# Altium PCB LED_dr_320_v0.1.PcbDoc
Units mm, origin at the board's own origin, x right, y up, seen from the top; angles counter-clockwise.
Board outline 152.4 x 101.6 mm, 2 copper layers (Top Layer, Bottom Layer); 33 components, 22 nets, 101 pads, 8 vias.
Unrouted connection lines stored in the file: 67.
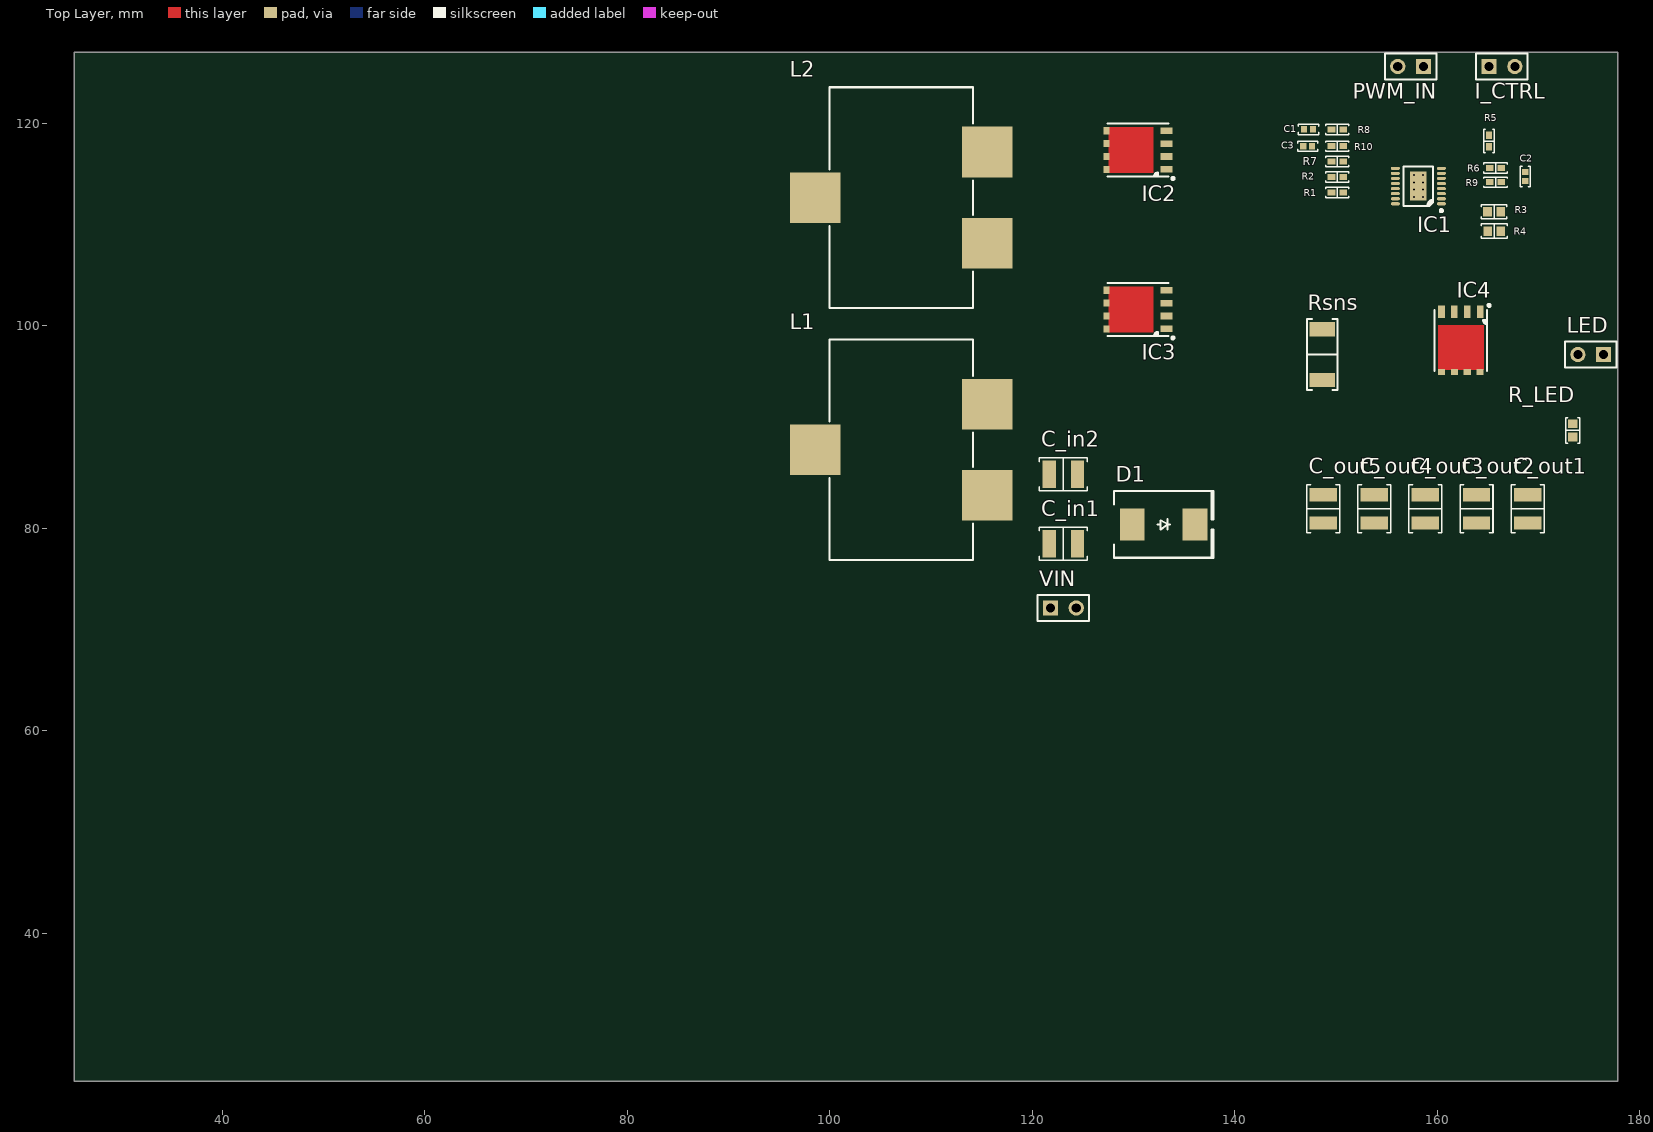
[diagram p0: Top Layer view]
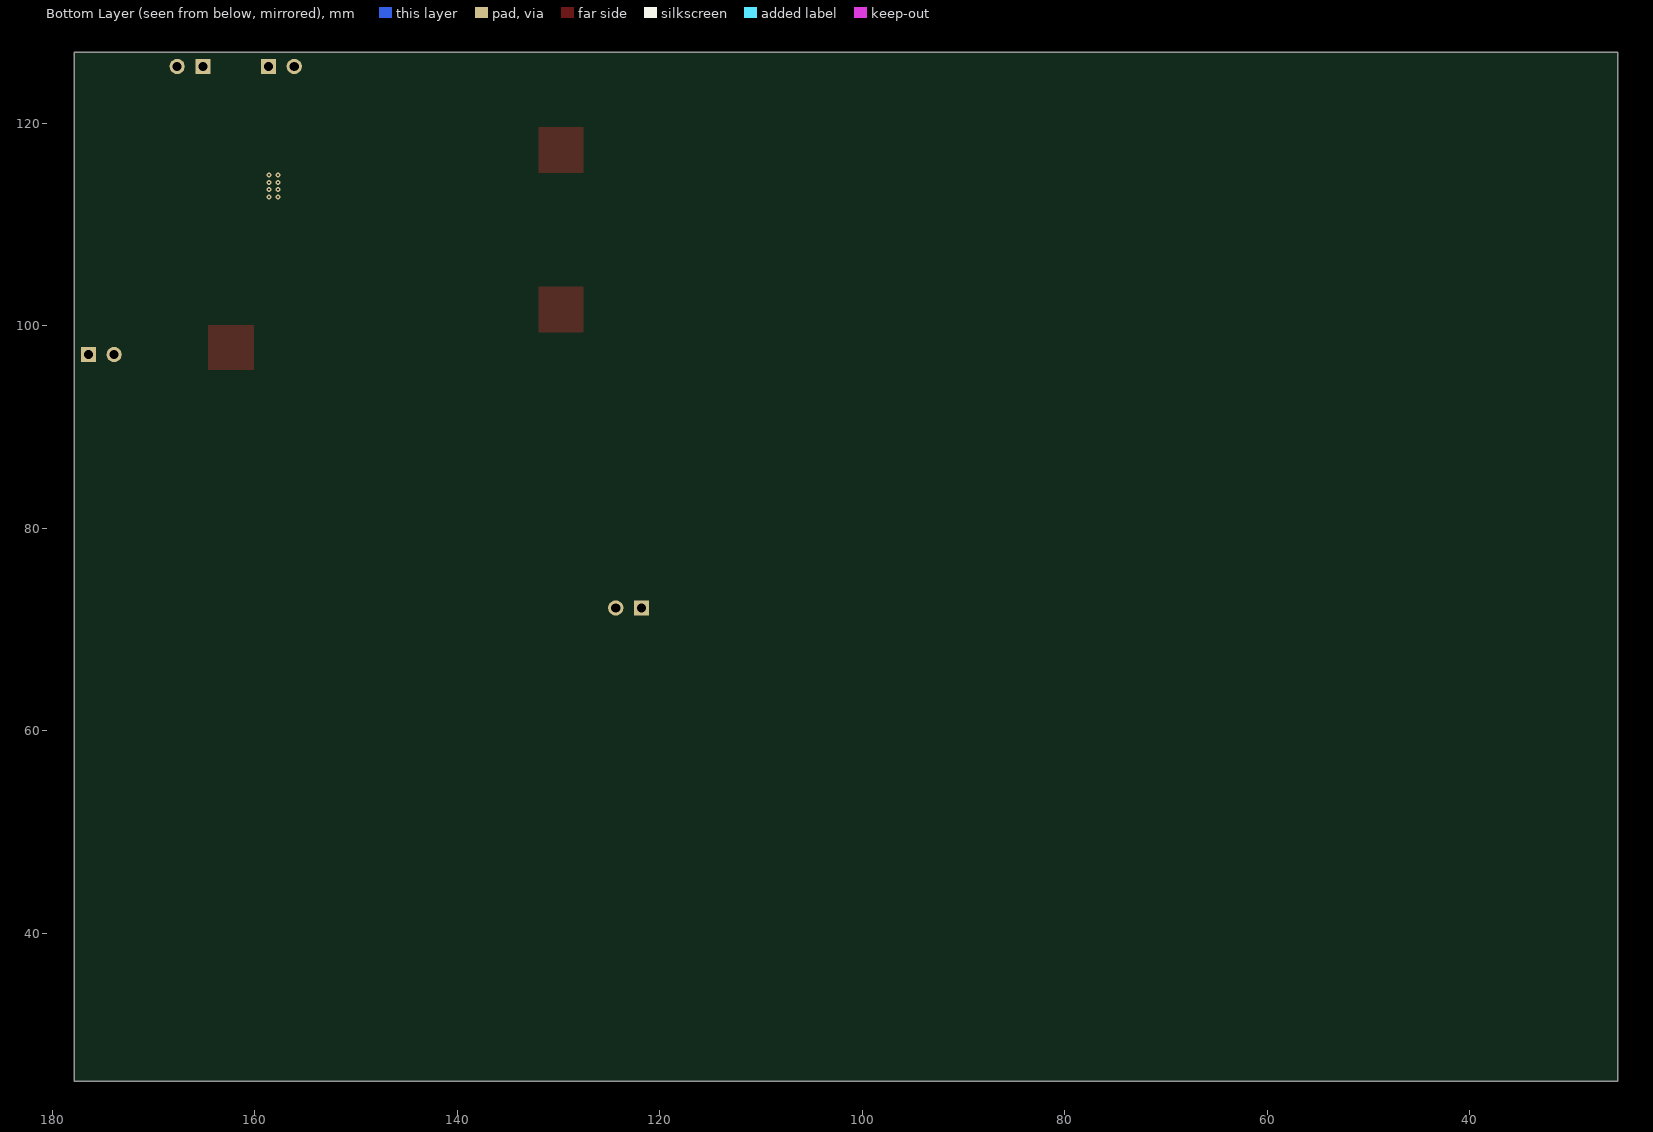
[diagram p1: Bottom Layer view, seen from below]

## Layer stack, top to bottom
Top Solder: solder mask 0.0102, Solder Resist, Dk 3.5
Top Layer: signal copper 0.0356
Dielectric 1: dielectric 0.32, FR-4, Dk 4.8
Bottom Layer: signal copper 0.0356
Bottom Solder: solder mask 0.0102, Solder Resist, Dk 3.5

## Board outline
25.4,25.4 177.8,25.4 177.8,127 25.4,127

## Design rules (kind name [scope] priority, off if disabled: settings)
Clearance [All] p1: gap=0.254 ignorepadtopadclearanceinfootprint=FALSE except(0: Arc-Hole Track-Hole SMDPad-Hole THPad-Hole Via-Hole Fill-Hole Poly-Hole Region-Hole Text-Hole)
PolygonConnect [All] p1: connectstyle=Relief reliefconductorwidth=0.254 reliefentries=4 polygonreliefangle="90 Angle" airgapwidth=0.254
RoutingVias [All] p1: holewidth=0.711 width=1.27 viastyle="Through Hole" minholewidth=0.711 minwidth=1.27 maxholewidth=0.711 maxwidth=1.27
SolderMaskExpansion [All] p1: expansion=0.102
Width [All] p1: maxlimit=0.254 minlimit=0.254 preferedwidth=0.254
30 further rules are at their usual default settings.

## Components (designator, comment, footprint, x,y, rotation, side; value= is the part's Value field where it differs from the comment)
C1 "4.7µF" "CAP 0402_1005" 147.261,119.38 r0 top
C2 "4700pF" "CAP 0402_1005" 168.656,114.74 r270 top
C3 "0.1µF" "CAP 0402_1005" 147.193,117.729 r0 top
C_in1 "4.7µF" "CAP 1210_3225 - 2.8MM" 123.066,78.486 r180 top
C_in2 "4.7µF" "CAP 1210_3225 - 2.8MM" 123.066,85.344 r180 top
C_out1 "4.7µF" "CAP 1210_3225 - 2.8MM" 168.91,81.915 r270 top
C_out2 "4.7µF" "CAP 1210_3225 - 2.8MM" 163.862,81.915 r270 top
C_out3 "4.7µF" "CAP 1210_3225 - 2.8MM" 158.814,81.915 r270 top
C_out4 "4.7µF" "CAP 1210_3225 - 2.8MM" 153.765,81.915 r270 top
C_out5 "4.7µF" "CAP 1210_3225 - 2.8MM" 148.717,81.915 r270 top
D1 "S10GCHR7G" "DO214AB SMC" 132.969,80.391 r0 top
I_CTRL "Header 2" HDR1X2 165.1,125.603 r0 top
IC1 "LT3756EMSE-2#TRPBF" "LTC MSOP-16 MSE16" 158.115,113.792 r180 top
IC2 "BSC060N10NS3GATMA1" "INFINEON PG-TDSON-8" 130.429,117.348 r180 top
IC3 "BSC060N10NS3GATMA1" "INFINEON PG-TDSON-8" 130.429,101.6 r180 top
IC4 "BSC060N10NS3GATMA1" "INFINEON PG-TDSON-8" 162.306,98.552 r270 top
L1 "7443634700" "WURTH WE-HCF 14.5MM" 107.061,87.757 r90 top
L2 "7443634700" "WURTH WE-HCF 14.5MM" 107.061,112.649 r90 top
LED "Header 2" HDR1X2 176.403,97.155 r180 top
PWM_IN "Header 2" HDR1X2 158.623,125.603 r180 top
R1 "499 kOhms" "RES 0402_1005" 150.114,113.157 r180 top
R2 "23.2 kOhms" "RES 0402_1005" 150.114,114.681 r0 top
R3 "787 kOhms" "RES 0603_1608" 165.593,111.252 r0 top
R4 "10 kOhms" "RES 0603_1608" 165.608,109.347 r180 top
R5 "9.1 kOhms" "RES 0402_1005" 165.1,118.237 r270 top
R6 "1 kOhms" "RES 0402_1005" 165.735,115.57 r180 top
R7 "42.2 kOhms" "RES 0402_1005" 150.114,116.205 r0 top
R8 "100 kOhms" "RES 0402_1005" 150.114,119.38 r0 top
R9 "10 kOhms" "RES 0402_1005" 165.735,114.173 r180 top
R10 "10 kOhms" "RES 0402_1005" 150.114,117.729 r0 top
R_LED "56 mOhms" "RES 0603_1608" 173.355,89.662 r270 top
Rsns "20 mOhms" "STACKPOLE CSR2010" 148.617,97.155 r90 top
VIN "Header 2" HDR1X2 121.793,72.136 r0 top

## Footprints (in the part's own frame and the unit in brackets; to place one, negate y for a bottom-side part, rotate by r counter-clockwise, add the part's x,y. Pads: shape width x height; smd on the part's side, far side on the other; paste and mask are expansions set on the pad)
"CAP 0402_1005" [mm] "Chip Capacitor, 2-Leads, Body 1.02x0.51mm, IPC Medium Density"
  rect 0.6x0.64 smd: 1(-0.44,0) 2(0.44,0)
  silkscreen extent -1,-0.5 1,0.5, body extent -0.5,-0.26 0.5,0.26, height 0.52
"CAP 1210_3225 - 2.8MM" [mm] "Chip Capacitor, 2-Leads, Body 3.20x2.50mm, IPC Medium Density"
  rect 1.3x2.7 smd: 1(-1.4,0) 2(1.4,0)
  silkscreen extent -2.37,-1.63 2.37,1.63, body extent -1.6,-1.25 1.6,1.25, height 2.8
"DO214AB SMC" [mm] "Molded Diode, 2-Leads, Body 6.85x5.90mm, IPC Medium Density"
  rect 2.45x3.15 smd: 1(-3.1,0) 2(3.1,0)
  silkscreen extent -4.9,-3.3 4.9,3.3, body extent -3.97,-2.95 3.97,2.95, height 2.6
HDR1X2 [mm] "Connector; Header; 2 Position"
  rect 1.5x1.5 hole 0.9: 1(0,0)
  round 1.5 hole 0.9: 2(2.54,0)
  silkscreen extent -1.27,-1.27 3.81,1.27
"INFINEON PG-TDSON-8" [mm] "TDSON, 8-Leads, Body 6x5mm, Pitch 1.27mm, Thermal Pad 1.65x2.38mm, IPC Medium Density"
  rect 1.2x0.65 smd: 1(-2.825,1.905) 2(-2.825,0.635) 3(-2.825,-0.635) 4(-2.825,-1.905)
  rect 0.6x0.7 smd: 5(3.125,-1.905) 6(3.125,-0.635) 7(3.125,0.635) 8(3.125,1.905)
  Top Layer region: -1.5,-2.25 2.9,-2.25 2.9,2.25 -1.5,2.25
  silkscreen extent -3.58,-2.6 3,2.92, body extent -3.07,-2.58 3.08,2.57, height 1
"LTC MSOP-16 MSE16" [mm] "16-Lead Plastic MSOP, Exposed Die Pad"
  oval 0.889x0.305 smd: 1(-2.275,1.75) 2(-2.275,1.25) 3(-2.275,0.75) 4(-2.275,0.25) 5(-2.275,-0.25) 6(-2.275,-0.75) 7(-2.275,-1.25) 8(-2.275,-1.75) 9(2.275,-1.75) 10(2.275,-1.25) 11(2.275,-0.75) 12(2.275,-0.25) 13(2.275,0.25) 14(2.275,0.75) 15(2.275,1.25) 16(2.275,1.75)
  rect 1.651x2.845 smd: 17(0,0)
  silkscreen extent -2.4,-1.95 1.45,2.55, body extent -2.49,-2.05 2.49,2.04, height 1.1
"RES 0402_1005" [mm] "Chip Resistor, 2-Leads, Body 1.0x0.5mm, IPC Medium Density"
  rect 0.75x0.6 smd: 1(-0.575,0) 2(0.575,0)
  silkscreen extent -1.14,-0.51 1.14,0.51, body extent -0.5,-0.25 0.5,0.25, height 0.35
"RES 0603_1608" [mm] "Chip Resistor, 2-Leads, Body 1.60x0.80mm, IPC Medium Density"
  rect 0.85x0.95 smd: 1(-0.65,0) 2(0.65,0)
  silkscreen extent -1.27,-0.7 1.27,0.7, body extent -0.8,-0.4 0.8,0.4, height 0.45
"STACKPOLE CSR2010" [mm] "Chip Resistor, 2-Leads, Body 5.00x2.54mm, IPC Medium Density"
  rect 1.4x2.5 smd: 1(-2.5,0) 2(2.5,0)
  silkscreen extent -3.5,-1.5 3.5,1.5, body extent -2.57,-1.27 2.58,1.27, height 0.5
"WURTH WE-HCF 14.5MM" [mm] "SMD High Current Inductor, body 21.8x14.2mm"
  rect 5x5 smd: 1(-4.5,-8.5) 2(4.5,-8.5) 3(0,8.5)
  silkscreen extent -10.9,-7.1 10.9,7.1, body extent -10.75,-10.6 10.75,10.4, height 14

## Part data
C1: library part GRM155R61A475MEAAD, "CAP CER 4.7UF 10V X5R 0402", Device Package="0402 (1005 Metric)", Manufacturer="Murata Electronics", Operating Temperature="-55°C ~ 85°C", Supplier Part Number 1=490-14306-2-ND, Temperature Coefficient=X5R, Tolerance=±20%, Voltage - Rated=10V, Applications="General Purpose", Capacitance=4.7µF, ComponentLink1Description=Datasheet, ComponentLink1URL=https://search.murata.co.jp/Ceramy/image/img/A01X/G101/ENG/GRM155R61A475MEAA-01.pdf, ComponentLink2Description="DigiKey Link", ComponentLink2URL=//digikey.com/product-detail/en/murata-electronics/GRM155R61A475MEAAD/490-14306-2-ND/6234735, LastUpdated="29-Nov-19 20:59:51", Lifecycle Status=0, Minimum Order=1, Mounting Type="Surface Mount, MLCC", Package / Case="0402 (1005 Metric)", Packaging=TapeAndReel, PartId=6746, Part Number=GRM155R61A475MEAAD, Part Status=Active, Price=0.03, Series=GRM, Size / Dimension="0.039\" L x 0.020\" W (1.00mm x 0.50mm)", Supplier 1=DigiKey, Thickness (Max)="0.026\" (0.65mm)"
C2: library part C0402C472K4RECAUTO, "CAP CER 0402 4.7NF 16V X7R 10%", Device Package="0402 (1005 Metric)", Manufacturer=KEMET, Operating Temperature="-55°C ~ 125°C", Ratings=AEC-Q200, Supplier Part Number 1=399-17875-2-ND, Temperature Coefficient=X7R, Tolerance=±10%, Voltage - Rated=16V, Applications="Automotive, ESD Protection", Capacitance=4700pF, ComponentLink1Description=Datasheet, ComponentLink1URL=https://api.kemet.com/component-edge/download/datasheet/C0402C472K4RECAUTO.pdf, ComponentLink2Description="DigiKey Link", ComponentLink2URL=//digikey.com/product-detail/en/kemet/C0402C472K4RECAUTO/399-17875-2-ND/8640469, LastUpdated="29-Nov-19 21:00:00", Lifecycle Status=0, Minimum Order=1, Mounting Type="Surface Mount, MLCC", Package / Case="0402 (1005 Metric)", Packaging=TapeAndReel, PartId=12122, Part Number=C0402C472K4RECAUTO, Part Status=Active, Price=0.02, Series="ESD SMD Auto X7R", Size / Dimension="0.039\" L x 0.020\" W (1.00mm x 0.50mm)", Supplier 1=DigiKey, Thickness (Max)="0.022\" (0.55mm)"
C3: library part EMK105BJ104MV-F, "CAP CER 0.1UF 16V X5R 0402", Device Package="0402 (1005 Metric)", Manufacturer="Taiyo Yuden", Operating Temperature="-55°C ~ 85°C", Supplier Part Number 1=587-5513-2-ND, Temperature Coefficient=X5R, Tolerance=±20%, Voltage - Rated=16V, Applications="General Purpose", Capacitance=0.1µF, ComponentLink1Description=Datasheet, ComponentLink1URL="https://ds.yuden.co.jp/TYCOMPAS/ut/detail?pn=EMK105BJ104MV-F &u=M", ComponentLink2Description="DigiKey Link", ComponentLink2URL=//digikey.com/product-detail/en/taiyo-yuden/EMK105BJ104MV-F/587-5513-2-ND/6702361, LastUpdated="29-Nov-19 20:59:42", Lifecycle Status=0, Minimum Order=1, Mounting Type="Surface Mount, MLCC", Package / Case="0402 (1005 Metric)", Packaging=TapeAndReel, PartId=1946, Part Number=EMK105BJ104MV-F, Part Status=Active, Price=0.00, Series=M, Size / Dimension="0.039\" L x 0.020\" W (1.00mm x 0.50mm)", Supplier 1=DigiKey, Thickness (Max)="0.022\" (0.55mm)"
C_in1 C_in2 C_out1 C_out2 C_out3 C_out4 C_out5: library part 12101C475K4T2A, "CAP CER 4.7UF 100V X7R 1210", Device Package="1210 (3225 Metric)", Manufacturer="AVX Corporation", Operating Temperature="-55°C ~ 125°C", Ratings=AEC-Q200, Supplier Part Number 1=478-12147-2-ND, Temperature Coefficient=X7R, Tolerance=±10%, Voltage - Rated=100V, Applications=Automotive, Capacitance=4.7µF, ComponentLink1Description=Datasheet, ComponentLink1URL=http://datasheets.avx.com/AutoMLCC.pdf, ComponentLink2Description="DigiKey Link", ComponentLink2URL=//digikey.com/product-detail/en/avx-corporation/12101C475K4T2A/478-12147-2-ND/9374708, LastUpdated="29-Nov-19 21:52:00", Lifecycle Status=0, Minimum Order=1, Mounting Type="Surface Mount, MLCC", Package / Case="1210 (3225 Metric)", Packaging=TapeAndReel, PartId=23695, Part Number=12101C475K4T2A, Part Status=Active, Price=0.30, Series=-, Size / Dimension="0.130\" L x 0.098\" W (3.30mm x 2.50mm)", Supplier 1=DigiKey, Thickness (Max)="0.110\" (2.79mm)"
D1: "DIODE GEN PURP 400V 10A DO214AB", Capacitance @ Vr, F="60pF @ 4V, 1MHz", Current - Average Rectified (Io)=10A, Current - Reverse Leakage @ Vr="1µA @ 400V", Device Package="DO-214AB, SMC", Manufacturer="Taiwan Semiconductor Corporation", Operating Temperature - Junction="-55°C ~ 150°C", Supplier Device Package="DO-214AB (SMC)", Supplier Part Number 1=S10GCHR7GTR-ND, Voltage - DC Reverse (Vr) (Max)=400V, Voltage - Forward (Vf) (Max) @ If="1.1V @ 10A", ComponentLink1Description=Datasheet, ComponentLink1URL=https://www.taiwansemi.com/products/datasheet/S10GC%20SERIES_B1708.pdf, ComponentLink2Description="DigiKey Link", ComponentLink2URL=//digikey.com/product-detail/en/taiwan-semiconductor-corporation/S10GCHR7G/S10GCHR7GTR-ND/7358226, Diode Type=Standard, LastUpdated="01-Dec-19 16:28:29", Lifecycle Status=0, Minimum Order=1, Mounting Type="Surface Mount", Package / Case="DO-214AB, SMC", Packaging=TapeAndReel, PartId=415, Part Number=S10GCHR7G, Part Status=Active, Price=0.24, Series=-, Speed="Fast Recovery =< 500ns, > 200mA (Io)", Supplier 1=DigiKey
I_CTRL LED PWM_IN VIN: "Header, 2-Pin", LatestRevisionDate=17-Jul-2002, LatestRevisionNote="Re-released for DXP Platform.", Publisher="Altium Limited"
IC1: "IC LED DRIVER CTRLR DIM 16MSOP", Device Package="16-TFSOP (0.118\", 3.00mm Width) Exposed Pad", Frequency="100kHz ~ 1MHz", Manufacturer="Linear Technology/Analog Devices", Operating Temperature="-40°C ~ 125°C (TJ)", Supplier Device Package=16-MSOP-EP, Supplier Part Number 1=LT3756EMSE-2#TRPBFTR-ND, Voltage - Output=100V, Voltage - Supply (Min)=6V, ComponentLink1Description=Datasheet, ComponentLink1URL=http://www.linear.com/docs/26674, ComponentLink2Description="DigiKey Link", ComponentLink2URL=//digikey.com/product-detail/en/linear-technology-analog-devices/LT3756EMSE-2-TRPBF/LT3756EMSE-2-TRPBFTR-ND/2107813, Dimming="Analog, PWM", Internal Switch(s)=No, LastUpdated="09-Dec-19 01:26:27", Lifecycle Status=0, Minimum Order=1, Mounting Type="Surface Mount", Number of Outputs=1, Package / Case="16-TFSOP (0.118\", 3.00mm Width) Exposed Pad", Packaging=TapeAndReel, PartId=5, Part Number=LT3756EMSE-2#TRPBF, Part Status=Active, Price=4.07, Series=-, Supplier 1=DigiKey, Topology="Flyback, SEPIC, Step-Down (Buck), Step-Up (Boost)", Type="DC DC Controller", Voltage - Supply (Max)=100V
IC2 IC3 IC4: "MOSFET N-CH 100V 90A TDSON-8", Current - Continuous Drain (Id) @ 25°C="14.9A (Ta), 90A (Tc)", Device Package=8-PowerTDFN, Drain to Source Voltage (Vdss)=100V, Drive Voltage (Max Rds On,  Min Rds On)="6V, 10V", Input Capacitance (Ciss) (Max) @ Vds="4900pF @ 50V", Manufacturer="Infineon Technologies", Operating Temperature="-55°C ~ 150°C (TJ)", Power Dissipation (Max)="125W (Tc)", Supplier Device Package=PG-TDSON-8-1, Supplier Part Number 1=BSC060N10NS3GATMA1TR-ND, ComponentLink1Description=Datasheet, ComponentLink1URL=https://www.infineon.com/dgdl/BSC060N10NS3+Rev2.4.pdf?folderId=db3a304313b8b5a60113cee8763b02d7&fileId=db3a30431ce5fb52011d1aab7f90133a, ComponentLink2Description="DigiKey Link", ComponentLink2URL=//digikey.com/product-detail/en/infineon-technologies/BSC060N10NS3GATMA1/BSC060N10NS3GATMA1TR-ND/2080630, FET Type=N-Channel, Gate Charge (Qg) (Max) @ Vgs="68nC @ 10V", LastUpdated="14-Dec-19 18:17:59", Lifecycle Status=0, Minimum Order=1, Mounting Type="Surface Mount", Package / Case=8-PowerTDFN, Packaging=TapeAndReel, Part Number=BSC060N10NS3GATMA1, Part Status=Active, Price=1.25, Rds On (Max) @ Id, Vgs="6mOhm @ 50A, 10V", Series=OptiMOS™, Supplier 1=DigiKey, Technology="MOSFET (Metal Oxide)", Vgs (Max)=±20V, Vgs(th) (Max) @ Id="3.5V @ 90µA"
L1 L2: "FIXED IND 47UH 12A 12.2 MOHM SMD", Current Rating (Amps)=12A, Device Package=Nonstandard, Manufacturer="Wurth Elektronik", Operating Temperature="-40°C ~ 125°C", Supplier Part Number 1=732-2525-2-ND, Tolerance=±15%, ComponentLink1Description=Datasheet, ComponentLink1URL=https://katalog.we-online.de/pbs/datasheet/7443634700.pdf, ComponentLink2Description="DigiKey Link", ComponentLink2URL=//digikey.com/product-detail/en/w-rth-elektronik/7443634700/732-2525-2-ND/2440342, Height - Seated (Max)="0.571\" (14.50mm)", LastUpdated="15-Dec-19 02:33:43", Lifecycle Status=0, Minimum Order=1, Mounting Type="Surface Mount", Package / Case=Nonstandard, Packaging=TapeAndReel, PartId=3230, Part Number=7443634700, Part Status=Active, Price=5.04, Series=WE-HCF, Shielding=Shielded, Size / Dimension="0.858\" L x 0.846\" W (21.80mm x 21.50mm)", Supplier 1=DigiKey, Type=Wirewound
R1: library part PFR05S-4993-FNH, "RES SMD 499 KOHM 1% 1/16W 0402", Device Package="0402 (1005 Metric)", Manufacturer="Delta Electronics/Cyntec", Operating Temperature="-55°C ~ 125°C", Power (Watts)="0.063W, 1/16W", Supplier Device Package=0402, Supplier Part Number 1=2037-PFR05S-4993-FNHTR-ND, Temperature Coefficient=±200ppm/°C, Tolerance=±1%, ComponentLink1Description=Datasheet, ComponentLink1URL=http://www.cyntec.com/upfile/products/download/RH000000NH%20_A3_PFR05.pdf, ComponentLink2Description="DigiKey Link", ComponentLink2URL=//digikey.com/product-detail/en/delta-electronics-cyntec/PFR05S-4993-FNH/2037-PFR05S-4993-FNHTR-ND/9761565, Composition="Thick Film", Height - Seated (Max)="0.016\" (0.40mm)", LastUpdated="29-Nov-19 21:01:09", Lifecycle Status=0, Minimum Order=1, Number of Terminations=2, Package / Case="0402 (1005 Metric)", Packaging=TapeAndReel, PartId=14823, Part Number=PFR05S-4993-FNH, Part Status=Active, Price=0.00, Resistance="499 kOhms", Series=PFR05, Size / Dimension="0.039\" L x 0.020\" W (1.00mm x 0.50mm)", Supplier 1=DigiKey
R2: library part RMCF0402FT23K2, "RES 23.2K OHM 1% 1/16W 0402", Device Package="0402 (1005 Metric)", Manufacturer="Stackpole Electronics Inc", Operating Temperature="-55°C ~ 155°C", Power (Watts)="0.063W, 1/16W", Ratings=AEC-Q200, Supplier Device Package=0402, Supplier Part Number 1=RMCF0402FT23K2TR-ND, Temperature Coefficient=±100ppm/°C, Tolerance=±1%, ComponentLink1Description=Datasheet, ComponentLink1URL=https://www.seielect.com/catalog/sei-packaging.pdf, ComponentLink2Description="DigiKey Link", ComponentLink2URL=//digikey.com/product-detail/en/stackpole-electronics-inc/RMCF0402FT23K2/RMCF0402FT23K2TR-ND/1714561, Composition="Thick Film", Features="Automotive AEC-Q200", Height - Seated (Max)="0.016\" (0.40mm)", LastUpdated="29-Nov-19 21:01:38", Lifecycle Status=0, Minimum Order=1, Number of Terminations=2, Package / Case="0402 (1005 Metric)", Packaging=TapeAndReel, PartId=22340, Part Number=RMCF0402FT23K2, Part Status=Active, Price=0.00, Resistance="23.2 kOhms", Series=RMCF, Size / Dimension="0.039\" L x 0.020\" W (1.00mm x 0.50mm)", Supplier 1=DigiKey
R3: library part ERJ-3EKF7873V, "RES SMD 787K OHM 1% 1/10W 0603", Device Package="0603 (1608 Metric)", Manufacturer="Panasonic Electronic Components", Operating Temperature="-55°C ~ 155°C", Power (Watts)="0.1W, 1/10W", Ratings=AEC-Q200, Supplier Device Package=0603, Supplier Part Number 1=P787KHTR-ND, Temperature Coefficient=±100ppm/°C, Tolerance=±1%, ComponentLink1Description=Datasheet, ComponentLink1URL=https://industrial.panasonic.com/cdbs/www-data/pdf/RDA0000/AOA0000C304.pdf, ComponentLink2Description="DigiKey Link", ComponentLink2URL=//digikey.com/product-detail/en/panasonic-electronic-components/ERJ-3EKF7873V/P787KHTR-ND/196481, Composition="Thick Film", Features="Automotive AEC-Q200", Height - Seated (Max)="0.022\" (0.55mm)", LastUpdated="29-Nov-19 21:00:58", Lifecycle Status=0, Minimum Order=1, Number of Terminations=2, Package / Case="0603 (1608 Metric)", Packaging=TapeAndReel, PartId=10928, Part Number=ERJ-3EKF7873V, Part Status=Active, Price=0.01, Resistance="787 kOhms", Series=ERJ, Size / Dimension="0.063\" L x 0.031\" W (1.60mm x 0.80mm)", Supplier 1=DigiKey
R4: library part ERJ-3EKF1002V, "RES SMD 10K OHM 1% 1/10W 0603", Device Package="0603 (1608 Metric)", Manufacturer="Panasonic Electronic Components", Operating Temperature="-55°C ~ 155°C", Power (Watts)="0.1W, 1/10W", Ratings=AEC-Q200, Supplier Device Package=0603, Supplier Part Number 1=P10.0KHTR-ND, Temperature Coefficient=±100ppm/°C, Tolerance=±1%, ComponentLink1Description=Datasheet, ComponentLink1URL=https://industrial.panasonic.com/cdbs/www-data/pdf/RDA0000/AOA0000C304.pdf, ComponentLink2Description="DigiKey Link", ComponentLink2URL=//digikey.com/product-detail/en/panasonic-electronic-components/ERJ-3EKF1002V/P10.0KHTR-ND/196066, Composition="Thick Film", Features="Automotive AEC-Q200", Height - Seated (Max)="0.022\" (0.55mm)", LastUpdated="29-Nov-19 21:02:03", Lifecycle Status=0, Minimum Order=1, Number of Terminations=2, Package / Case="0603 (1608 Metric)", Packaging=TapeAndReel, PartId=25695, Part Number=ERJ-3EKF1002V, Part Status=Active, Price=0.01, Resistance="10 kOhms", Series=ERJ, Size / Dimension="0.063\" L x 0.031\" W (1.60mm x 0.80mm)", Supplier 1=DigiKey
R5: library part RC0402FR-079K1L, "RES SMD 9.1K OHM 1% 1/16W 0402", Device Package="0402 (1005 Metric)", Manufacturer=Yageo, Operating Temperature="-55°C ~ 155°C", Power (Watts)="0.063W, 1/16W", Supplier Device Package=0402, Supplier Part Number 1=311-9.10KLRTR-ND, Temperature Coefficient=±100ppm/°C, Tolerance=±1%, ComponentLink1Description=Datasheet, ComponentLink1URL=https://www.yageo.com/upload/media/product/productsearch/datasheet/rchip/PYu-RC_Group_51_RoHS_L_10.pdf, ComponentLink2Description="DigiKey Link", ComponentLink2URL=//digikey.com/product-detail/en/yageo/RC0402FR-079K1L/311-9.10KLRTR-ND/726668, Composition="Thick Film", Features="Moisture Resistant", Height - Seated (Max)="0.016\" (0.40mm)", LastUpdated="29-Nov-19 21:01:25", Lifecycle Status=0, Minimum Order=1, Number of Terminations=2, Package / Case="0402 (1005 Metric)", Packaging=TapeAndReel, PartId=18956, Part Number=RC0402FR-079K1L, Part Status=Active, Price=0.00, Resistance="9.1 kOhms", Series=RC, Size / Dimension="0.039\" L x 0.020\" W (1.00mm x 0.50mm)", Supplier 1=DigiKey
R6: library part CR0402-FX-1001GLF, "RES SMD 1K OHM 1% 1/16W 0402", Device Package="0402 (1005 Metric)", Manufacturer="Bourns Inc.", Operating Temperature="-55°C ~ 155°C", Power (Watts)="0.063W, 1/16W", Supplier Device Package=0402, Supplier Part Number 1=CR0402-FX-1001GLFTR-ND, Temperature Coefficient=±100ppm/°C, Tolerance=±1%, ComponentLink1Description=Datasheet, ComponentLink1URL=https://www.bourns.com/docs/Product-Datasheets/CR0402.pdf, ComponentLink2Description="DigiKey Link", ComponentLink2URL=//digikey.com/product-detail/en/bourns-inc/CR0402-FX-1001GLF/CR0402-FX-1001GLFTR-ND/3593181, Composition="Thick Film", Height - Seated (Max)="0.016\" (0.40mm)", LastUpdated="29-Nov-19 21:00:45", Lifecycle Status=0, Minimum Order=1, Number of Terminations=2, Package / Case="0402 (1005 Metric)", Packaging=TapeAndReel, PartId=6619, Part Number=CR0402-FX-1001GLF, Part Status=Active, Price=0.00, Resistance="1 kOhms", Series=CR0402, Size / Dimension="0.039\" L x 0.020\" W (1.00mm x 0.50mm)", Supplier 1=DigiKey
R7: library part RC0402FR-0742K2L, "RES SMD 42.2K OHM 1% 1/16W 0402", Device Package="0402 (1005 Metric)", Manufacturer=Yageo, Operating Temperature="-55°C ~ 155°C", Power (Watts)="0.063W, 1/16W", Supplier Device Package=0402, Supplier Part Number 1=311-42.2KLRTR-ND, Temperature Coefficient=±100ppm/°C, Tolerance=±1%, ComponentLink1Description=Datasheet, ComponentLink1URL=https://www.yageo.com/upload/media/product/productsearch/datasheet/rchip/PYu-RC_Group_51_RoHS_L_10.pdf, ComponentLink2Description="DigiKey Link", ComponentLink2URL=//digikey.com/product-detail/en/yageo/RC0402FR-0742K2L/311-42.2KLRTR-ND/726608, Composition="Thick Film", Features="Moisture Resistant", Height - Seated (Max)="0.016\" (0.40mm)", LastUpdated="29-Nov-19 21:01:32", Lifecycle Status=0, Minimum Order=1, Number of Terminations=2, Package / Case="0402 (1005 Metric)", Packaging=TapeAndReel, PartId=20899, Part Number=RC0402FR-0742K2L, Part Status=Active, Price=0.00, Resistance="42.2 kOhms", Series=RC, Size / Dimension="0.039\" L x 0.020\" W (1.00mm x 0.50mm)", Supplier 1=DigiKey
R8: library part CR0402-FX-1003GLF, "RES SMD 100K OHM 1% 1/16W 0402", Device Package="0402 (1005 Metric)", Manufacturer="Bourns Inc.", Operating Temperature="-55°C ~ 155°C", Power (Watts)="0.063W, 1/16W", Supplier Device Package=0402, Supplier Part Number 1=CR0402-FX-1003GLFTR-ND, Temperature Coefficient=±100ppm/°C, Tolerance=±1%, ComponentLink1Description=Datasheet, ComponentLink1URL=https://www.bourns.com/docs/Product-Datasheets/CR0402.pdf, ComponentLink2Description="DigiKey Link", ComponentLink2URL=//digikey.com/product-detail/en/bourns-inc/CR0402-FX-1003GLF/CR0402-FX-1003GLFTR-ND/3740863, Composition="Thick Film", Height - Seated (Max)="0.016\" (0.40mm)", LastUpdated="29-Nov-19 21:00:45", Lifecycle Status=0, Minimum Order=1, Number of Terminations=2, Package / Case="0402 (1005 Metric)", Packaging=TapeAndReel, PartId=6626, Part Number=CR0402-FX-1003GLF, Part Status=Active, Price=0.00, Resistance="100 kOhms", Series=CR0402, Size / Dimension="0.039\" L x 0.020\" W (1.00mm x 0.50mm)", Supplier 1=DigiKey
R9 R10: library part CR0402-FX-1002GLF, "RES SMD 10K OHM 1% 1/16W 0402", Device Package="0402 (1005 Metric)", Manufacturer="Bourns Inc.", Operating Temperature="-55°C ~ 155°C", Power (Watts)="0.063W, 1/16W", Supplier Device Package=0402, Supplier Part Number 1=CR0402-FX-1002GLFTR-ND, Temperature Coefficient=±100ppm/°C, Tolerance=±1%, ComponentLink1Description=Datasheet, ComponentLink1URL=https://www.bourns.com/docs/Product-Datasheets/CR0402.pdf, ComponentLink2Description="DigiKey Link", ComponentLink2URL=//digikey.com/product-detail/en/bourns-inc/CR0402-FX-1002GLF/CR0402-FX-1002GLFTR-ND/3593192, Composition="Thick Film", Height - Seated (Max)="0.016\" (0.40mm)", LastUpdated="29-Nov-19 21:01:34", Lifecycle Status=0, Minimum Order=1, Number of Terminations=2, Package / Case="0402 (1005 Metric)", Packaging=TapeAndReel, PartId=21370, Part Number=CR0402-FX-1002GLF, Part Status=Active, Price=0.00, Resistance="10 kOhms", Series=CR0402, Size / Dimension="0.039\" L x 0.020\" W (1.00mm x 0.50mm)", Supplier 1=DigiKey
R_LED: library part ERJ-3BWFR056V, "RES 0.056 OHM 1% 1/3W 0603", Device Package="0603 (1608 Metric)", Manufacturer="Panasonic Electronic Components", Operating Temperature="-55°C ~ 155°C", Power (Watts)="0.333W, 1/3W", Supplier Device Package=0603, Supplier Part Number 1=P17249TR-ND, Temperature Coefficient=±150ppm/°C, Tolerance=±1%, ComponentLink1Description=Datasheet, ComponentLink1URL=https://industrial.panasonic.com/cdbs/www-data/pdf/RDN0000/AOA0000C313.pdf, ComponentLink2Description="DigiKey Link", ComponentLink2URL=//digikey.com/product-detail/en/panasonic-electronic-components/ERJ-3BWFR056V/P17249TR-ND/4972251, Composition="Thick Film", Features="Current Sense", Height - Seated (Max)="0.026\" (0.65mm)", LastUpdated="29-Nov-19 21:01:14", Lifecycle Status=0, Minimum Order=1, Number of Terminations=2, Package / Case="0603 (1608 Metric)", Packaging=TapeAndReel, PartId=16098, Part Number=ERJ-3BWFR056V, Part Status=Active, Price=0.06, Resistance="56 mOhms", Series=ERJ, Size / Dimension="0.063\" L x 0.031\" W (1.60mm x 0.80mm)", Supplier 1=DigiKey
Rsns: library part RW0S6BBR020FET, "RES 0.02 OHM 1% 0.6W 2010", Device Package="2010 (5025 Metric)", Manufacturer=Ohmite, Operating Temperature="-55°C ~ 150°C", Power (Watts)=0.6W, Supplier Device Package=2010, Supplier Part Number 1=RW0S6BBR020FETTR-ND, Temperature Coefficient=±90ppm/°C, Tolerance=±1%, ComponentLink1Description=Datasheet, ComponentLink1URL=http://www.ohmite.com/assets/docs/res_surfmount.pdf?r=false, ComponentLink2Description="DigiKey Link", ComponentLink2URL=//digikey.com/product-detail/en/ohmite/RW0S6BBR020FET/RW0S6BBR020FETTR-ND/1124883, Composition=Wirewound, Features="Current Sense", Height - Seated (Max)="0.140\" (3.55mm)", LastUpdated="29-Nov-19 21:03:48", Lifecycle Status=0, Minimum Order=1, Number of Terminations=2, Package / Case="2010 (5025 Metric)", Packaging=TapeAndReel, PartId=1299, Part Number=RW0S6BBR020FET, Part Status=Active, Price=0.64, Resistance="20 mOhms", Series=RW, Size / Dimension="0.202\" L x 0.100\" W (5.14mm x 2.54mm)", Supplier 1=DigiKey

## Via types
v1: diameter 0.5, hole 0.2, Top Layer to Bottom Layer, 8 vias

## Nets (pads, with @x,y where several pads share a name; then routed paths per layer and width w, separated by ;. In a path a pad name is that pad's centre, name@x,y a point inside that pad or via, vN(x,y) a via of type N, cw(c..) or ccw(c..) an arc to the next point about the centre after c; other vN are vias at no path point)
48V: C_in1.2 C_in2.2 IC1.14 L1.1 R1.2 VIN.1
CTRL: IC1.6 R5.2 R6.2
FB: IC1.2 R3.1 R4.2
Gate: IC1.16 IC2.4 IC3.4
GND: C1.1 C2.1 C3.1 C_in1.1 C_in2.1 C_out1.1 C_out2.1 C_out3.1 C_out4.1 C_out5.1 I_CTRL.2 IC1.17 IC4.1 IC4.2 IC4.3 PWM_IN.2 R2.1 R4.1 R6.1 R7.1 Rsns.1 VIN.2
  other v1: 157.665,112.717 158.565,112.717 157.665,113.434 158.565,113.434 157.665,114.15 158.565,114.15 157.665,114.867 158.565,114.867
IADJ: I_CTRL.1 R5.1
INTVCC: C1.2 IC1.13 R8.1
ISN: IC1.3 LED.1 R_LED.1
ISP: C_out1.2 C_out2.2 C_out3.2 C_out4.2 C_out5.2 D1.2 IC1.4 R3.2 R_LED.2
LED-: IC4.5 IC4.6 IC4.7 IC4.8 LED.2
NetC2_2: C2.2 R9.1
NetC3_2: C3.2 R10.1
NetD1_1: D1.1 IC2.5 IC2.6 IC2.7 IC2.8 IC3.5 IC3.6 IC3.7 IC3.8 L2.2
NetIC1_5: IC1.5 R9.2
NetIC1_9: IC1.9 R8.2
NetIC1_10: IC1.10 R10.2
NetIC1_11: IC1.11 R7.2
NetL1_2: L1.2 L2.1
PWM_IN: IC1.8 PWM_IN.1
PWMOUT: IC1.1 IC4.4
SENSE: IC1.15 IC2.1 IC2.2 IC2.3 IC3.1 IC3.2 IC3.3 Rsns.2
UVLO: IC1.12 R1.1 R2.2
pads on no net: IC1.7 L1.3 L2.3